# Altium PCB XTAL_tht.PcbDoc
Units mil, origin at the board's own origin, x right, y up, seen from the top; angles counter-clockwise.
Board outline 6000 x 4000 mil, 2 copper layers (Top Layer, Bottom Layer); 36 components, 0 nets, 96 pads, 0 vias.
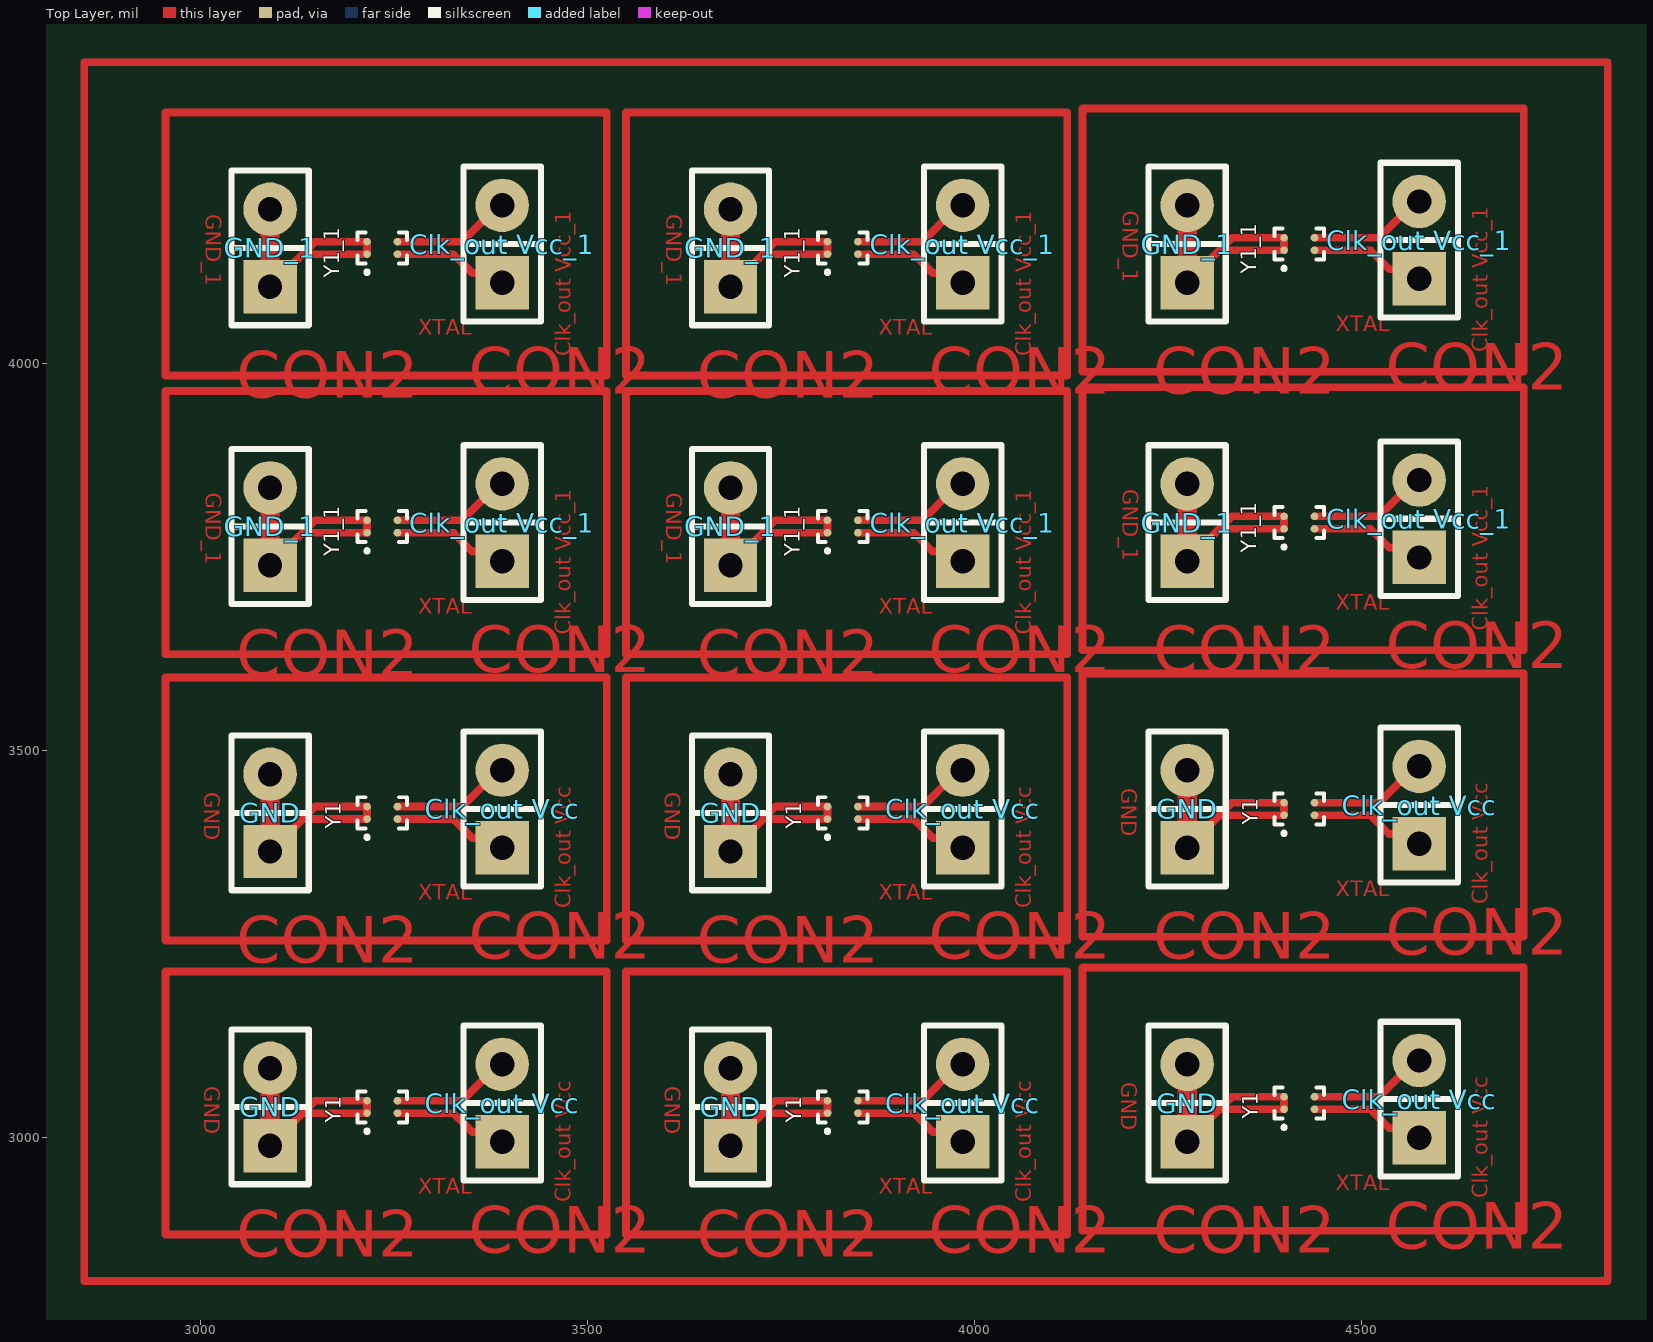
[diagram p0: Top Layer view]
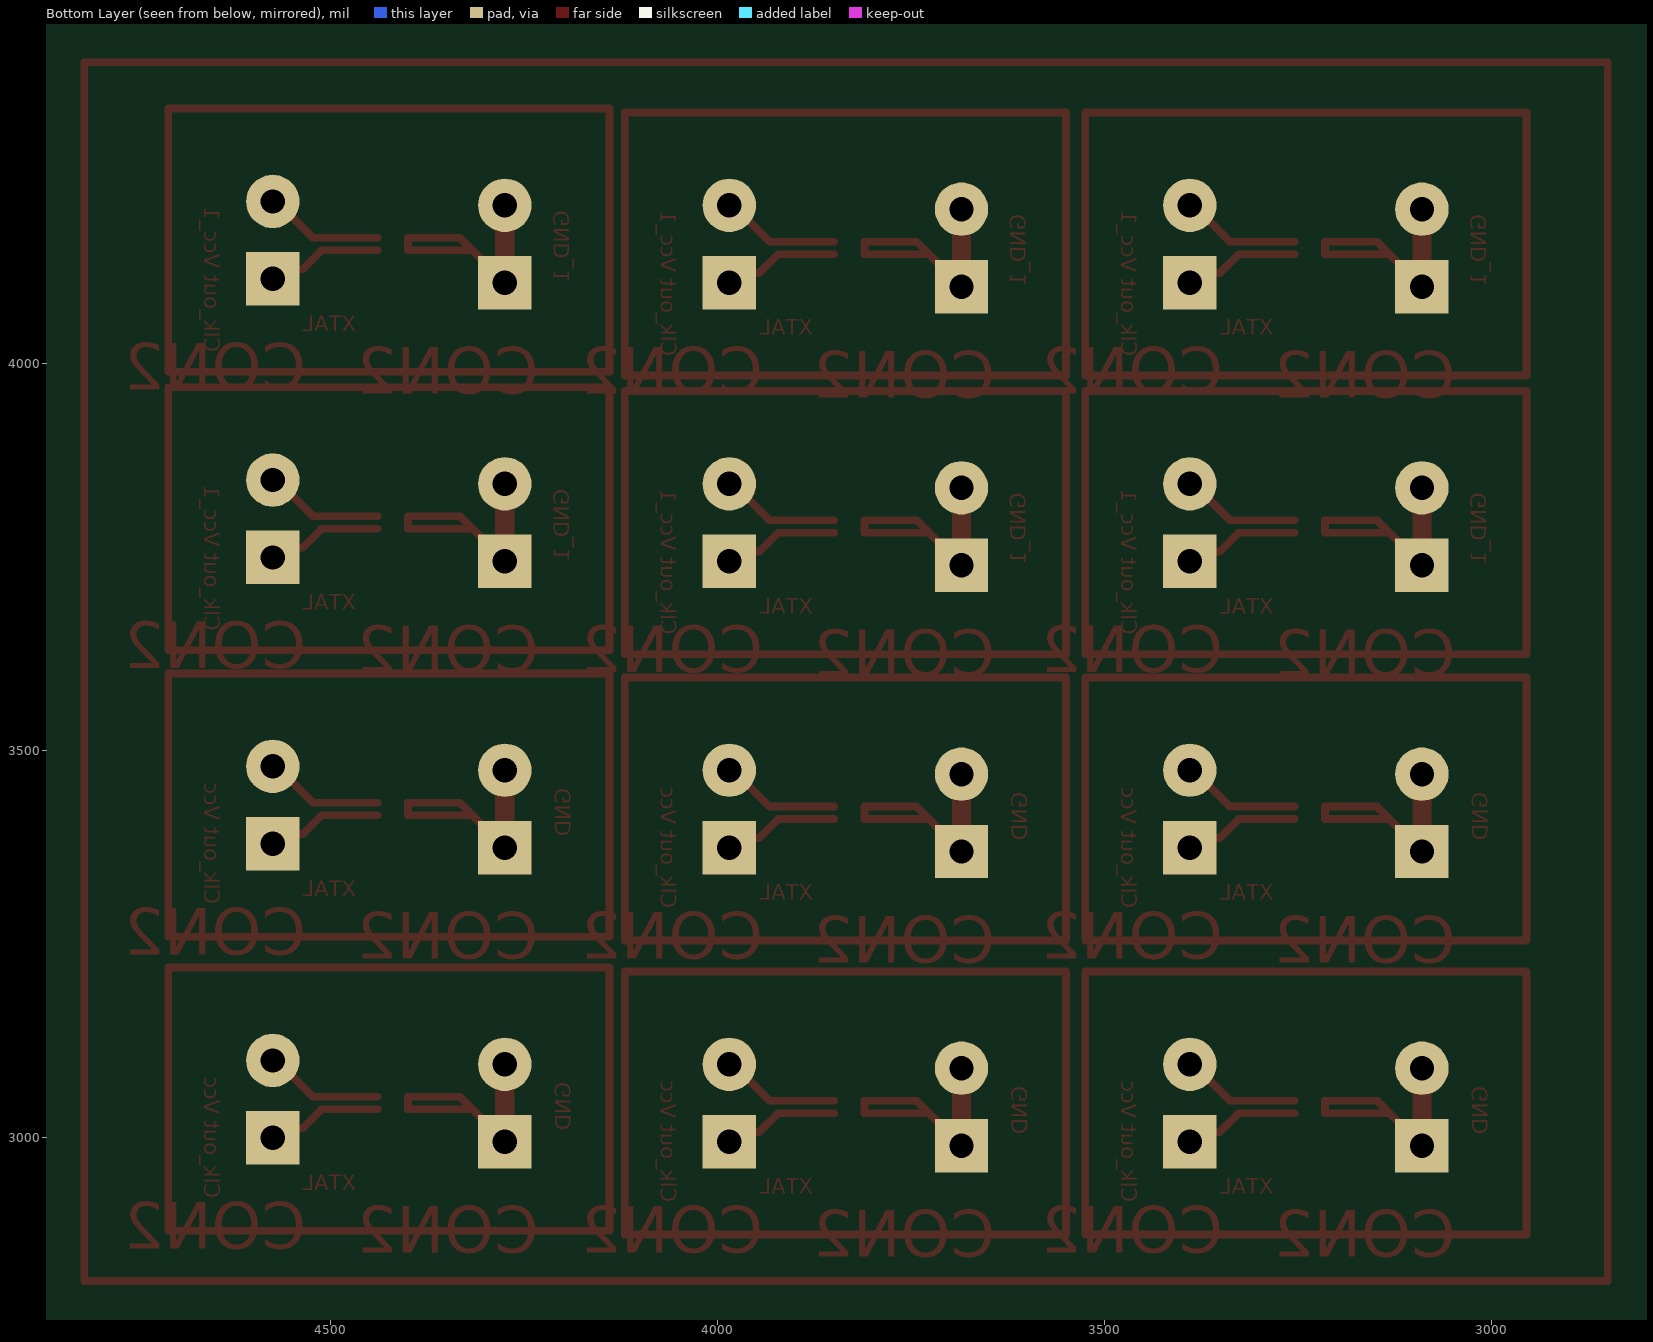
[diagram p1: Bottom Layer view, seen from below]

## Layer stack, top to bottom
Top Solder: solder mask 0.4, Solder Resist, Dk 3.5
Top Layer: signal copper 1.4
Dielectric 1: dielectric 12.6, FR-4, Dk 4.8
Bottom Layer: signal copper 1.4
Bottom Solder: solder mask 0.4, Solder Resist, Dk 3.5

## Board outline
1000,1000 7000,1000 7000,5000 1000,5000

## Design rules (kind name [scope] priority, off if disabled: settings)
Clearance [All] p1: gap=10 ignorepadtopadclearanceinfootprint=FALSE except(0: Arc-Hole Track-Hole SMDPad-Hole THPad-Hole Via-Hole Fill-Hole Poly-Hole Region-Hole Text-Hole)
PolygonConnect [All] p1: connectstyle=Relief reliefconductorwidth=10 reliefentries=4 polygonreliefangle="90 Angle" airgapwidth=10
RoutingVias [All] p1: holewidth=28 width=50 viastyle="Through Hole" minholewidth=28 minwidth=50 maxholewidth=28 maxwidth=50
SolderMaskExpansion [All] p1: expansion=4 istentingtop=FALSE
Width [All] p1: maxlimit=10 minlimit=10 preferedwidth=10
30 further rules are at their usual default settings.

## Components (designator, comment, footprint, x,y, rotation, side; value= is the part's Value field where it differs from the comment)
"Clk_out Vcc" "CON2" SIP2 3390,3045 r90 top (schematic designator PWR?)
"Clk_out Vcc" "CON2" SIP2 3390,3425 r90 top (schematic designator PWR?)
"Clk_out Vcc" "CON2" SIP2 3985,3425 r90 top (schematic designator PWR?)
"Clk_out Vcc" "CON2" SIP2 3985,3045 r90 top (schematic designator PWR?)
"Clk_out Vcc" "CON2" SIP2 4575,3430 r90 top (schematic designator PWR?)
"Clk_out Vcc" "CON2" SIP2 4575,3050 r90 top (schematic designator PWR?)
"Clk_out Vcc_1" "CON2" SIP2 4575,3800 r90 top (schematic designator PWR?)
"Clk_out Vcc_1" "CON2" SIP2 4575,4160 r90 top (schematic designator PWR?)
"Clk_out Vcc_1" "CON2" SIP2 3985,3795 r90 top (schematic designator PWR?)
"Clk_out Vcc_1" "CON2" SIP2 3985,4155 r90 top (schematic designator PWR?)
"Clk_out Vcc_1" "CON2" SIP2 3390,4155 r90 top (schematic designator PWR?)
"Clk_out Vcc_1" "CON2" SIP2 3390,3795 r90 top (schematic designator PWR?)
GND "CON2" SIP2 3090,3040 r90 top (schematic designator PWR?)
GND "CON2" SIP2 3090,3420 r90 top (schematic designator PWR?)
GND "CON2" SIP2 3685,3420 r90 top (schematic designator PWR?)
GND "CON2" SIP2 3685,3040 r90 top (schematic designator PWR?)
GND "CON2" SIP2 4275,3425 r90 top (schematic designator PWR?)
GND "CON2" SIP2 4275,3045 r90 top (schematic designator PWR?)
GND_1 "CON2" SIP2 4275,3795 r90 top (schematic designator PWR?)
GND_1 "CON2" SIP2 4275,4155 r90 top (schematic designator PWR?)
GND_1 "CON2" SIP2 3685,3790 r90 top (schematic designator PWR?)
GND_1 "CON2" SIP2 3685,4150 r90 top (schematic designator PWR?)
GND_1 "CON2" SIP2 3090,4150 r90 top (schematic designator PWR?)
GND_1 "CON2" SIP2 3090,3790 r90 top (schematic designator PWR?)
Y1 "XTAL" BGA4C100X41P2X2_154X84X60N 3235,3040 r90 top
Y1 "XTAL" BGA4C100X41P2X2_154X84X60N 3235,3420 r90 top
Y1 "XTAL" BGA4C100X41P2X2_154X84X60N 3830,3420 r90 top
Y1 "XTAL" BGA4C100X41P2X2_154X84X60N 3830,3040 r90 top
Y1 "XTAL" BGA4C100X41P2X2_154X84X60N 4420,3425 r90 top
Y1 "XTAL" BGA4C100X41P2X2_154X84X60N 4420,3045 r90 top
Y1_1 "XTAL" BGA4C100X41P2X2_154X84X60N 4420,3795 r90 top (schematic designator Y1)
Y1_1 "XTAL" BGA4C100X41P2X2_154X84X60N 4420,4155 r90 top (schematic designator Y1)
Y1_1 "XTAL" BGA4C100X41P2X2_154X84X60N 3830,3790 r90 top (schematic designator Y1)
Y1_1 "XTAL" BGA4C100X41P2X2_154X84X60N 3830,4150 r90 top (schematic designator Y1)
Y1_1 "XTAL" BGA4C100X41P2X2_154X84X60N 3235,4150 r90 top (schematic designator Y1)
Y1_1 "XTAL" BGA4C100X41P2X2_154X84X60N 3235,3790 r90 top (schematic designator Y1)

## Footprints (in the part's own frame and the unit in brackets; to place one, negate y for a bottom-side part, rotate by r counter-clockwise, add the part's x,y. Pads: shape width x height; smd on the part's side, far side on the other; paste and mask are expansions set on the pad)
BGA4C100X41P2X2_154X84X60N [mm]
  round 0.25 smd: 1(-0.205,0.5) 2(-0.205,-0.5) 3(0.205,-0.5) 4(0.205,0.5)
  silkscreen extent -0.82,-0.81 0.51,0.81
SIP2 [mil]
  rect 69.06x69.06 hole 31.5: 1(-50,0)
  round 69.06 hole 31.5: 2(50,0)
  silkscreen extent -100,-50 100,50

## Nets (pads, with @x,y where several pads share a name; then routed paths per layer and width w, separated by ;. In a path a pad name is that pad's centre, name@x,y a point inside that pad or via, vN(x,y) a via of type N, cw(c..) or ccw(c..) an arc to the next point about the centre after c; other vN are vias at no path point)
pads on no net: "Clk_out Vcc.1" "Clk_out Vcc.2" "Clk_out Vcc_1.1" "Clk_out Vcc_1.2" GND.1 GND.2 GND_1.1 GND_1.2 Y1.1 Y1.2 Y1.3 Y1.4 Y1_1.1 Y1_1.2 Y1_1.3 Y1_1.4
copper on no net: | length 36632.9
  Top Layer w10: 3090,2990 3131.93,3031.93 ; 3090,3370 3131.93,3411.93 ; 3090,3740 3131.93,3781.93 ; 3090,4100 3131.93,4141.93 ; 3254.68,3031.93 3326.93,3031.93 3351.33,3007.53 3377.47,3007.53 3390,2995 ; 3254.68,3048.07 3338.07,3048.07 3380,3090 ; 3254.68,3411.93 3326.93,3411.93 3351.33,3387.53 3377.47,3387.53 3390,3375 ; 3254.68,3428.07 3338.07,3428.07 3380,3470 ; 3254.68,3781.93 3326.93,3781.93 3351.33,3757.53 3377.47,3757.53 3390,3745 ; 3254.68,3798.07 3338.07,3798.07 3380,3840 ; 3254.68,4141.93 3326.93,4141.93 3351.33,4117.53 3377.47,4117.53 3390,4105 ; 3254.68,4158.07 3338.07,4158.07 3380,4200 ; 3685,2990 3726.93,3031.93 ; 3685,3370 3726.93,3411.93 ; 3685,3740 3726.93,3781.93 ; 3685,4100 3726.93,4141.93 ; 3849.68,3031.93 3921.93,3031.93 3946.33,3007.53 3972.47,3007.53 3985,2995 ; 3849.68,3048.07 3933.07,3048.07 3975,3090 ; 3849.68,3411.93 3921.93,3411.93 3946.33,3387.53 3972.47,3387.53 3985,3375 ; 3849.68,3428.07 3933.07,3428.07 3975,3470 ; 3849.68,3781.93 3921.93,3781.93 3946.33,3757.53 3972.47,3757.53 3985,3745 ; 3849.68,3798.07 3933.07,3798.07 3975,3840 ; 3849.68,4141.93 3921.93,4141.93 3946.33,4117.53 3972.47,4117.53 3985,4105 ; 3849.68,4158.07 3933.07,4158.07 3975,4200 ; 4275,2995 4316.93,3036.93 ; 4275,3375 4316.93,3416.93 ; 4275,3745 4316.93,3786.93 ; 4275,4105 4316.93,4146.93 ; 4439.69,3036.93 4511.93,3036.93 4536.33,3012.53 4562.47,3012.53 4575,3000 ; 4439.69,3053.07 4523.07,3053.07 4565,3095 ; 4439.69,3416.93 4511.93,3416.93 4536.33,3392.53 4562.47,3392.53 4575,3380 ; 4439.69,3433.07 4523.07,3433.07 4565,3475 ; 4439.69,3786.93 4511.93,3786.93 4536.33,3762.53 4562.47,3762.53 4575,3750 ; 4439.69,3803.07 4523.07,3803.07 4565,3845 ; 4439.69,4146.93 4511.93,4146.93 4536.33,4122.53 4562.47,4122.53 4575,4110 ; 4439.69,4163.07 4523.07,4163.07 4565,4205 ; 3131.93,3031.93 3148.07,3048.07 3215.32,3048.07 3215.32,3031.93 3131.93,3031.93 ; 3131.93,3411.93 3215.32,3411.93 3215.32,3428.07 3148.07,3428.07 3131.93,3411.93 ; 3131.93,3781.93 3215.32,3781.93 3215.32,3798.07 3148.07,3798.07 3131.93,3781.93 ; 3131.93,4141.93 3148.07,4158.07 3215.32,4158.07 3215.32,4141.93 3131.93,4141.93 ; 3726.93,3031.93 3810.32,3031.93 3810.32,3048.07 3743.07,3048.07 3726.93,3031.93 ; 3726.93,3411.93 3743.07,3428.07 3810.32,3428.07 3810.32,3411.93 3726.93,3411.93 ; 3726.93,3781.93 3743.07,3798.07 3810.32,3798.07 3810.32,3781.93 3726.93,3781.93 ; 3726.93,4141.93 3810.32,4141.93 3810.32,4158.07 3743.07,4158.07 3726.93,4141.93 ; 4316.93,3036.93 4400.31,3036.93 4400.31,3053.07 4333.07,3053.07 4316.93,3036.93 ; 4316.93,3416.93 4333.07,3433.07 4400.31,3433.07 4400.31,3416.93 4316.93,3416.93 ; 4316.93,3786.93 4333.07,3803.07 4400.31,3803.07 4400.31,3786.93 4316.93,3786.93 ; 4316.93,4146.93 4400.31,4146.93 4400.31,4163.07 4333.07,4163.07 4316.93,4146.93 ; 2850,2815 4818.5,2815 4818.5,4389.8 2850,4389.8 2850,2815 ; 2955,2875 3525,2875 3525,3215 2955,3215 2955,2875 ; 2955,3255 3525,3255 3525,3595 2955,3595 2955,3255 ; 2955,3625 3525,3625 3525,3965 2955,3965 2955,3625 ; 2955,3985 3525,3985 3525,4325 2955,4325 2955,3985 ; 3550,2875 4120,2875 4120,3215 3550,3215 3550,2875 ; 3550,3255 4120,3255 4120,3595 3550,3595 3550,3255 ; 3550,3625 4120,3625 4120,3965 3550,3965 3550,3625 ; 3550,3985 4120,3985 4120,4325 3550,4325 3550,3985 ; 4140,2880 4710,2880 4710,3220 4140,3220 4140,2880 ; 4140,3260 4710,3260 4710,3600 4140,3600 4140,3260 ; 4140,3630 4710,3630 4710,3970 4140,3970 4140,3630 ; 4140,3990 4710,3990 4710,4330 4140,4330 4140,3990
  Top Layer w25: 3090,2990 3090,3090 ; 3090,3370 3090,3470 ; 3090,3740 3090,3840 ; 3090,4100 3090,4200 ; 3685,2990 3685,3090 ; 3685,3370 3685,3470 ; 3685,3740 3685,3840 ; 3685,4100 3685,4200 ; 4275,2995 4275,3095 ; 4275,3375 4275,3475 ; 4275,3745 4275,3845 ; 4275,4105 4275,4205